# Altium PCB PCB3.PcbDoc (part 1 of 3)
Units mil, origin at the board's own origin, x right, y up, seen from the top; angles counter-clockwise.
Board outline 3693.31 x 2873.7 mil, 2 copper layers (Top Layer, Bottom Layer); 240 components, 0 nets, 816 pads, 396 vias.
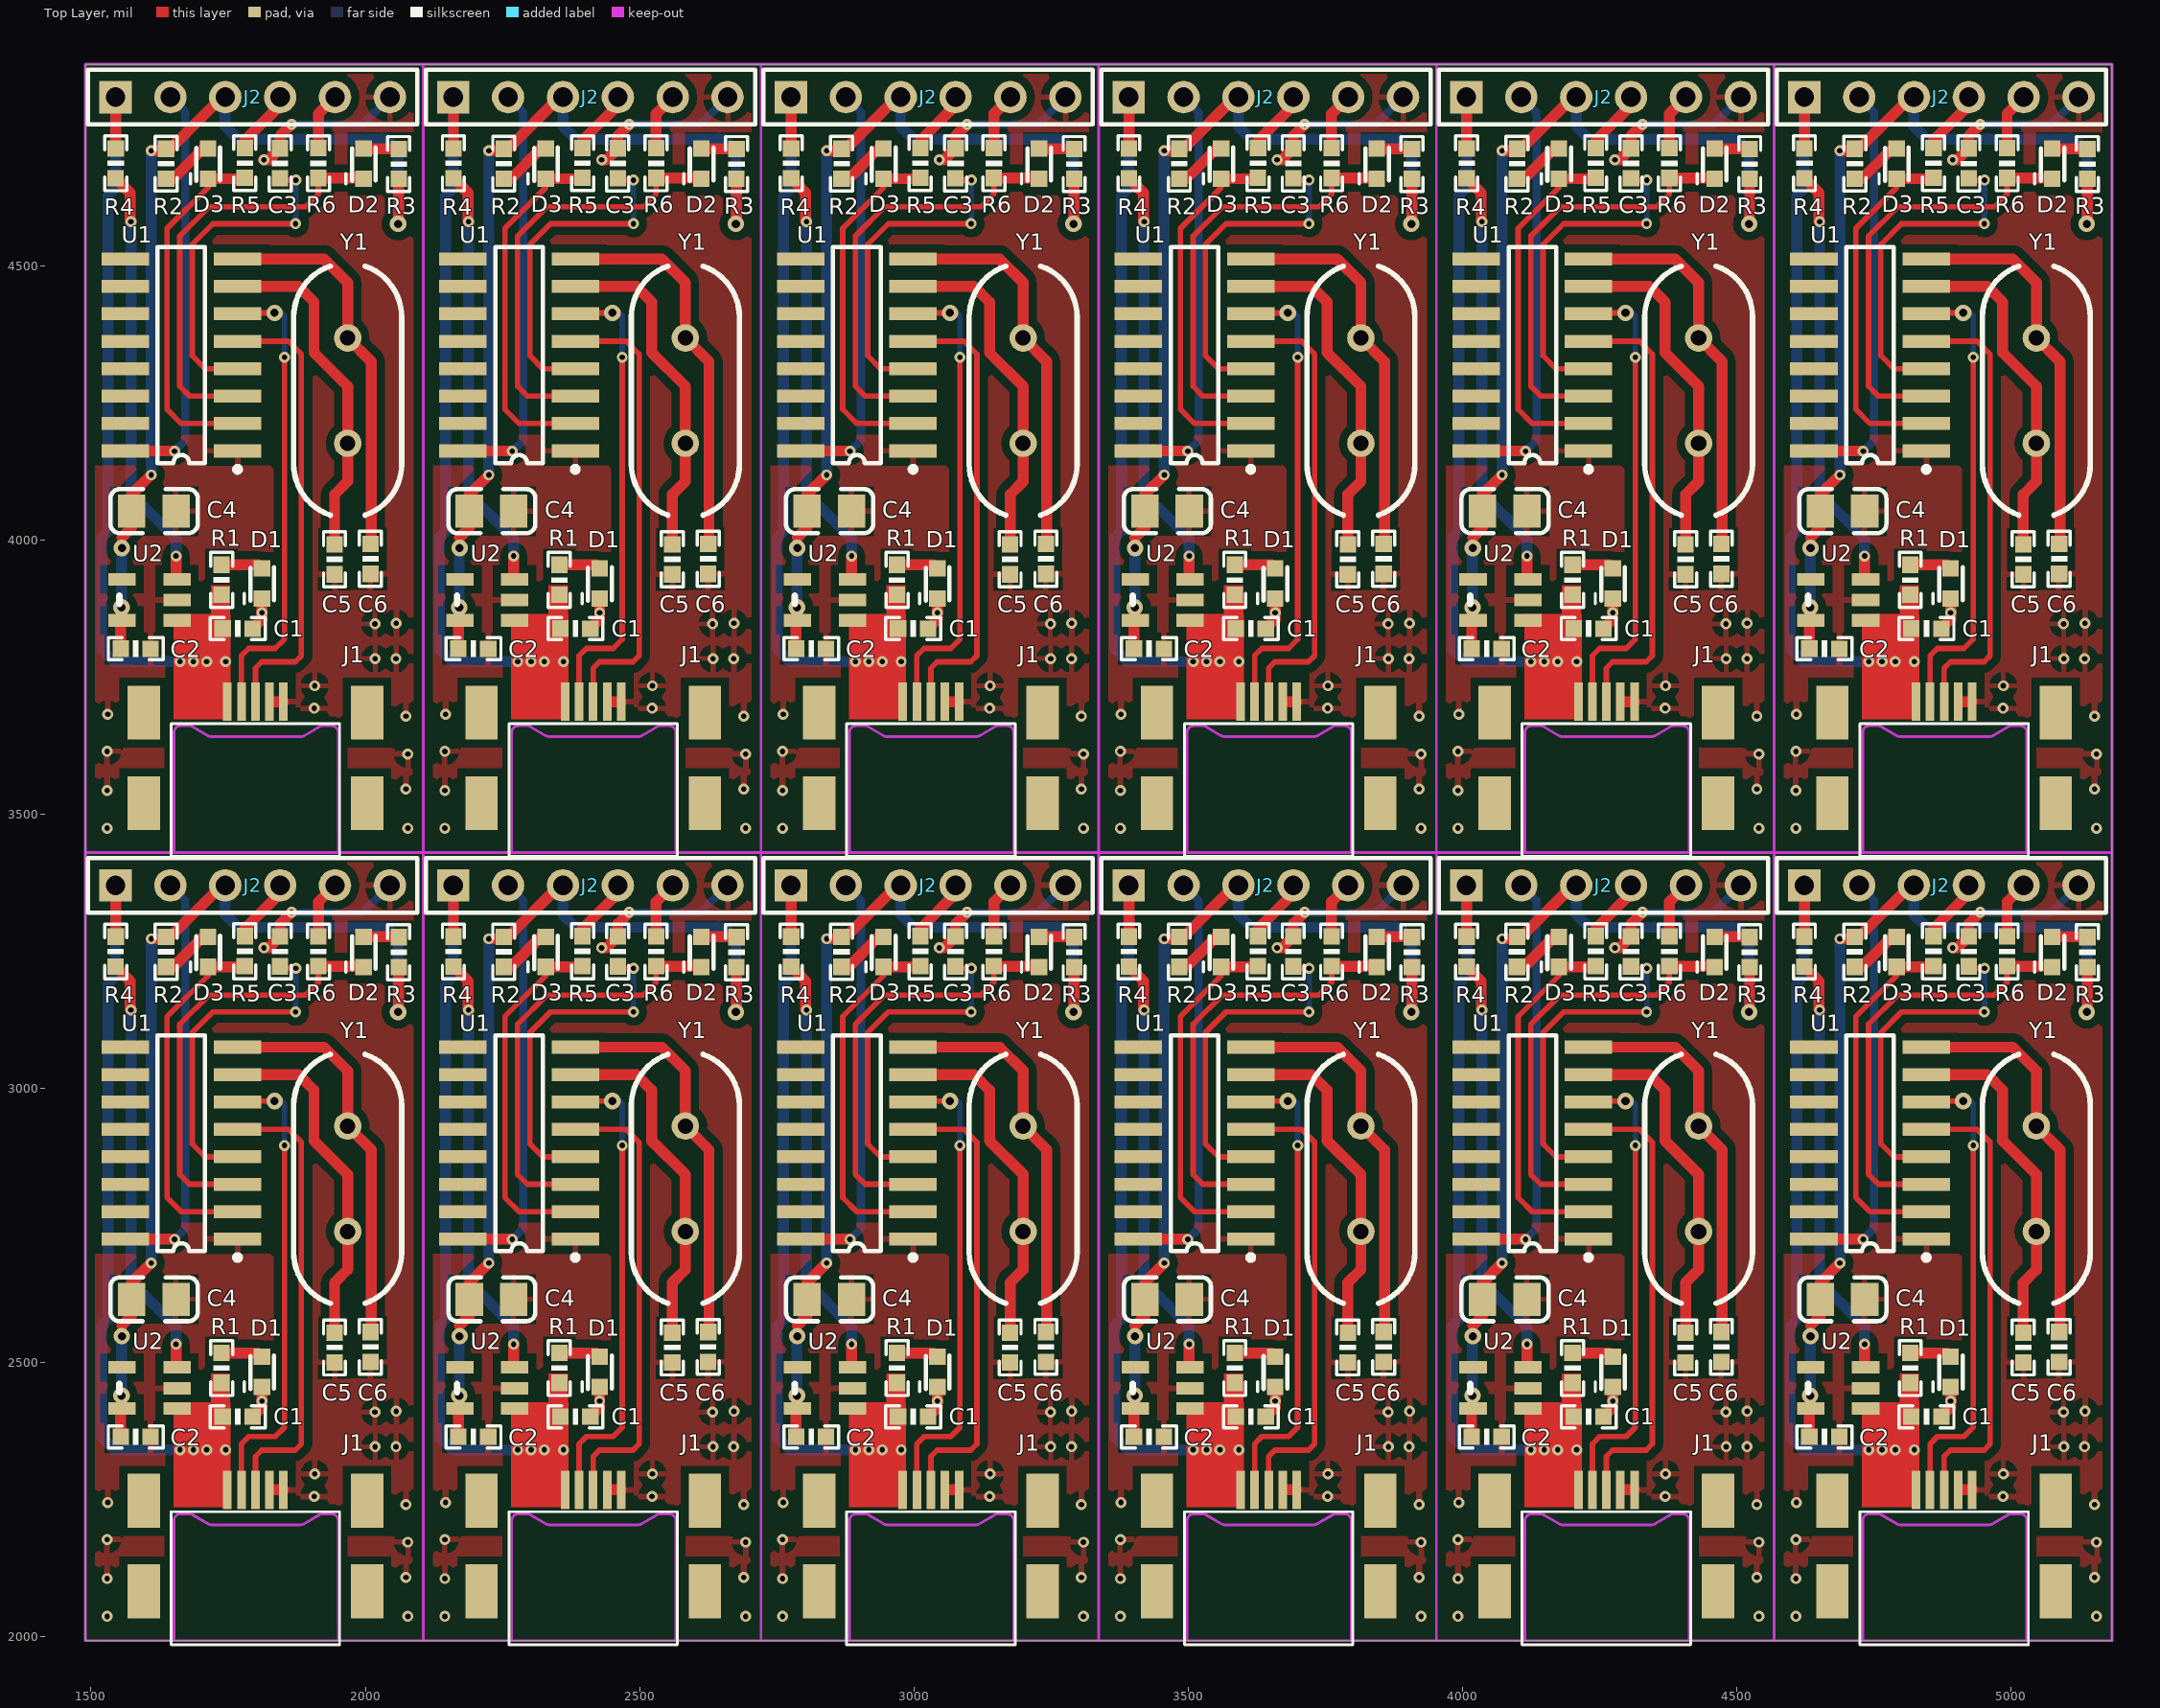
[diagram p0: Top Layer view]
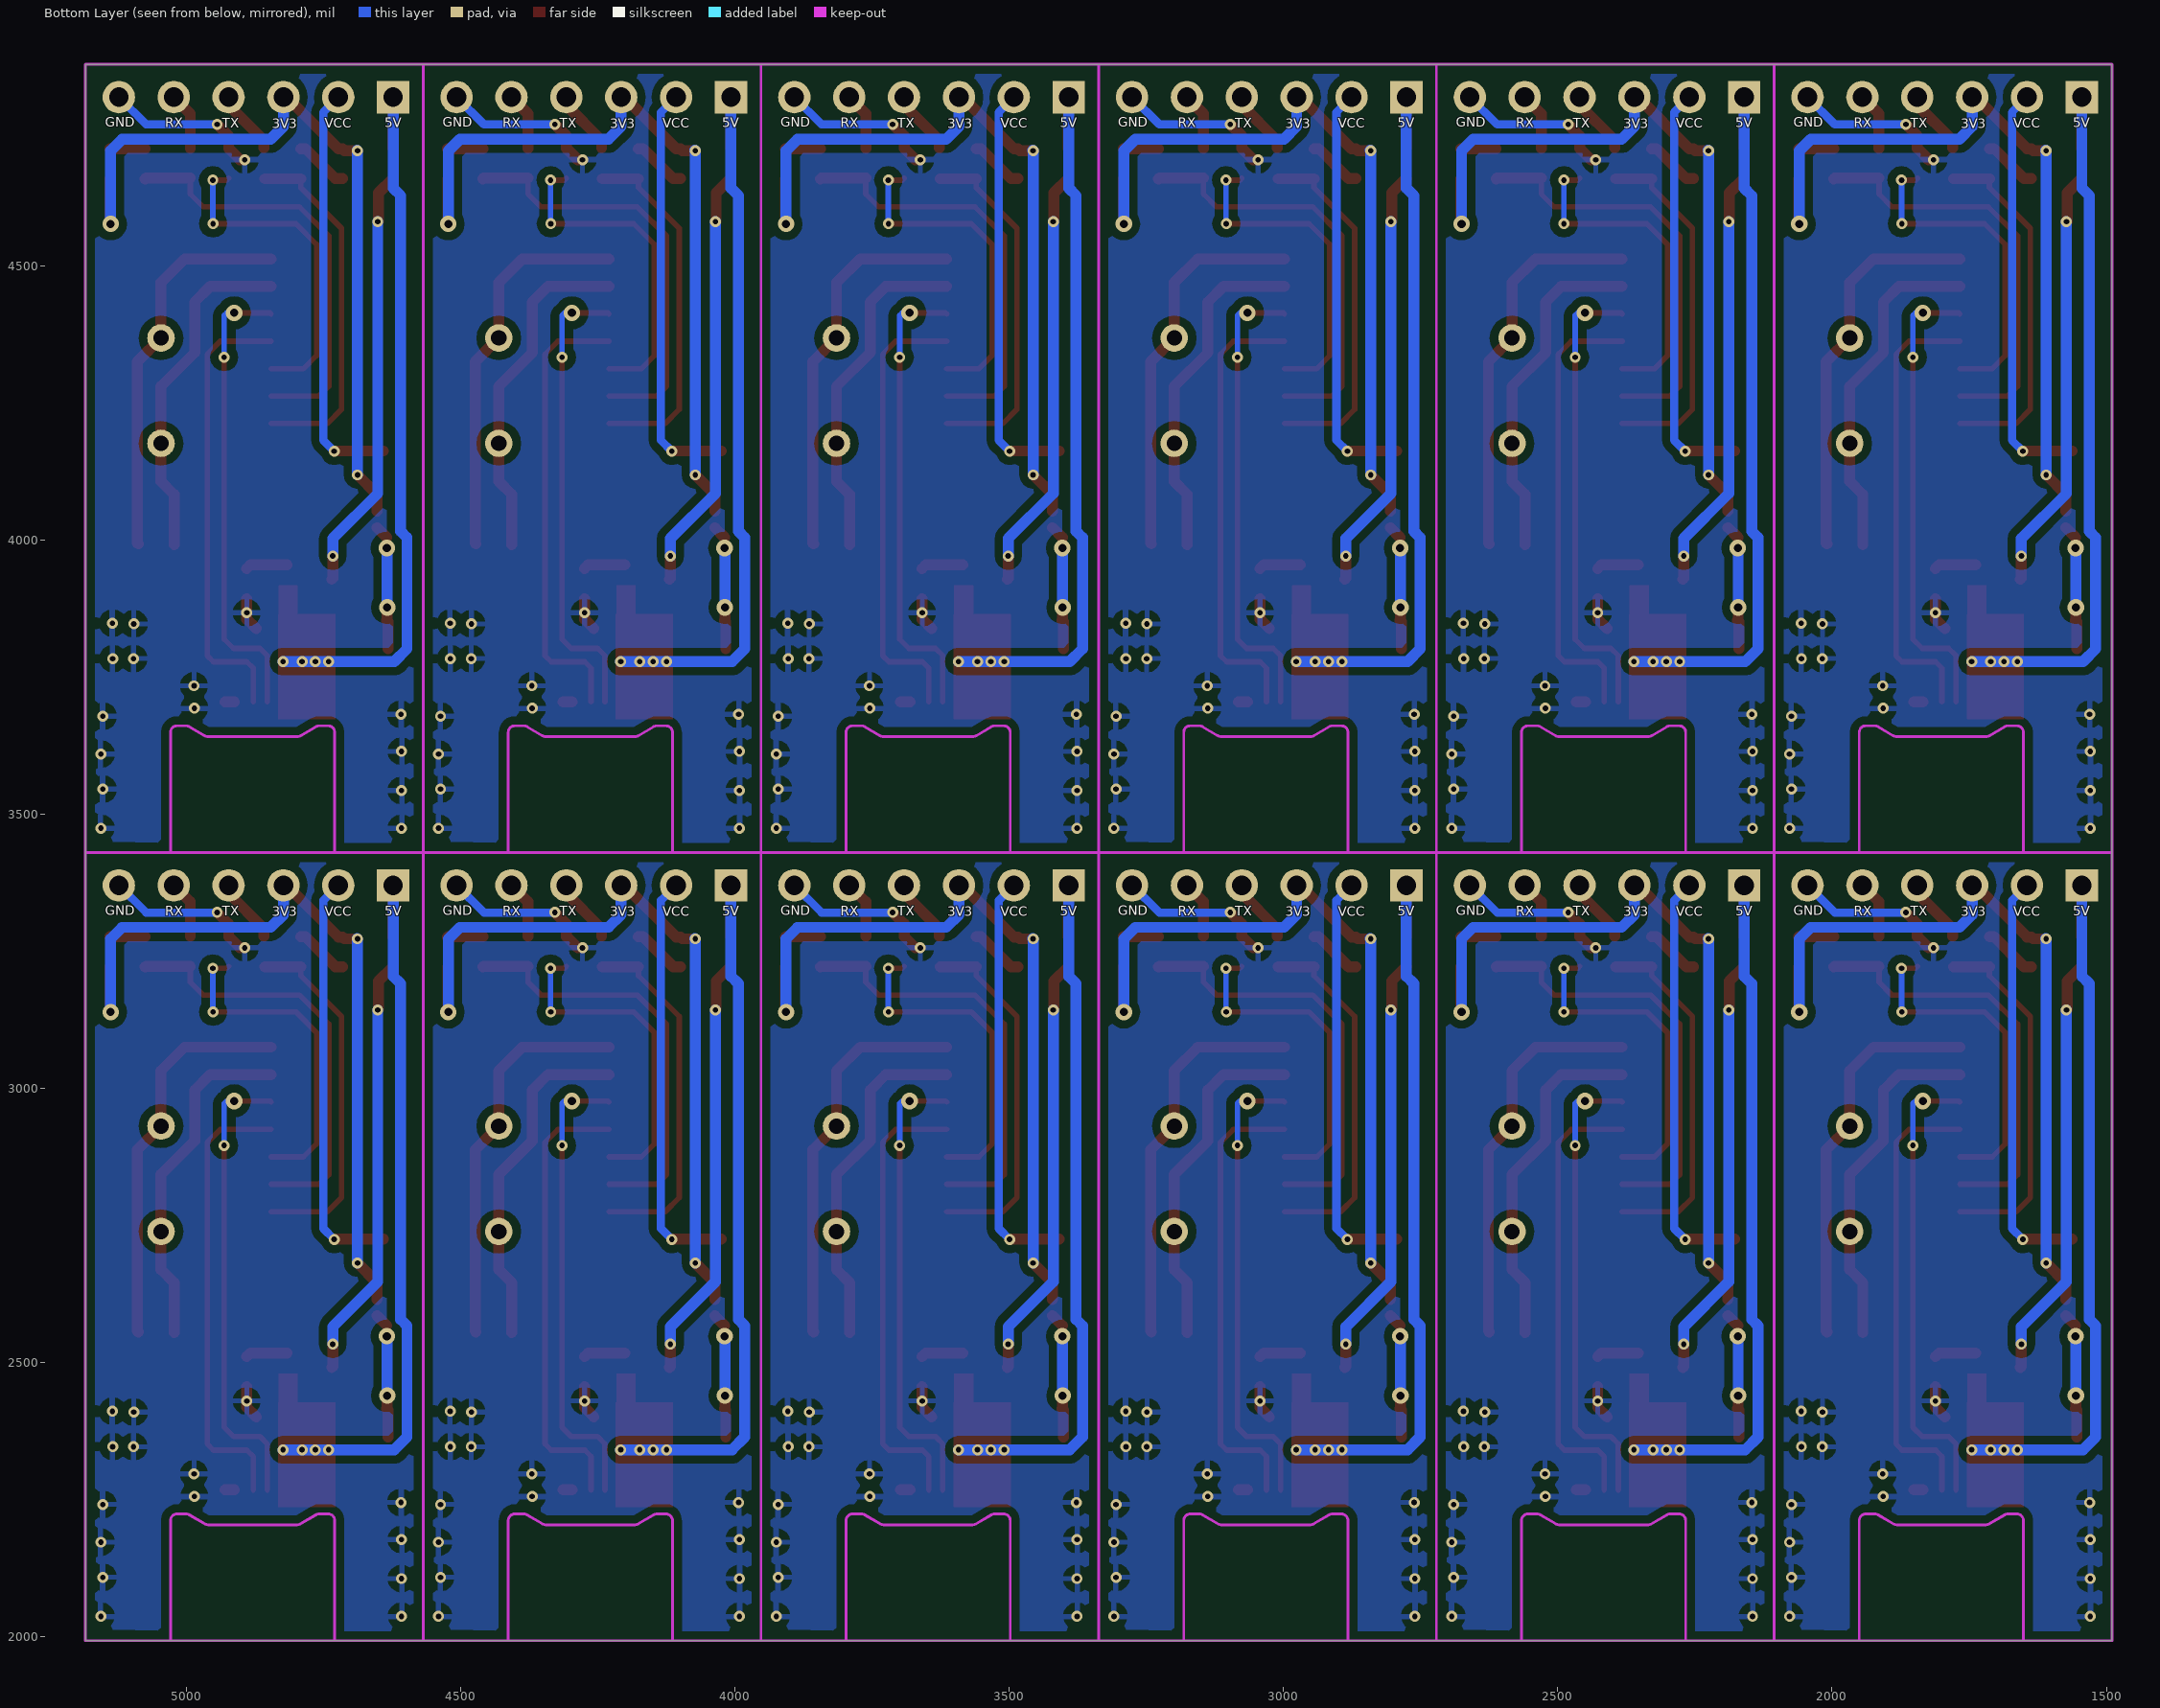
[diagram p1: Bottom Layer view, seen from below]

## Layer stack, top to bottom
Top Layer: signal copper 1.4
Dielectric: dielectric 12.6, FR-4, Dk 4.8
Bottom Layer: signal copper 1.4

## Board outline
1490,1993.15 1490,4866.85 5183.31,4866.85 5183.31,1993.15

## Design rules (kind name [scope] priority, off if disabled: settings)
Clearance [All] p1: gap=7
ComponentClearance [All] p1: gap=10 collisioncheckmode=3 verticalgap=0 showdistances=FALSE
HoleToHoleClearance [All] p1: gap=0 allowstackedmicrovias=TRUE
MinimumSolderMaskSliver [All] p1: minsoldermaskwidth=0
PolygonConnect [All] p1: connectstyle=Relief reliefconductorwidth=10 reliefentries=4 polygonreliefangle="90 Angle"
RoutingVias [All] p1: holewidth=28 width=50 viastyle="Through Hole" minholewidth=8 minwidth=8 maxholewidth=28 maxwidth=50
SilkToSilkClearance [All] p1: silktosilkclearance=0
SilkscreenOverComponentPads [All] p1: minsilkscreentomaskgap=0
SolderMaskExpansion [All] p1: expansion=4
Width [All] p1: maxlimit=50 minlimit=6 preferedwidth=10
23 further rules are at their usual default settings.

## Components (designator, comment, footprint, x,y, rotation, side; value= is the part's Value field where it differs from the comment)
C1 "0.1uF" 0603P 4845.28,2401.38 r180 top
C1 "0.1uF" 0603P 4229.73,2401.38 r180 top
C1 "0.1uF" 0603P 3614.18,2401.38 r180 top
C1 "0.1uF" 0603P 2998.63,2401.38 r180 top
C1 "0.1uF" 0603P 2383.08,2401.38 r180 top
C1 "0.1uF" 0603P 1767.52,2401.38 r180 top
C1 "0.1uF" 0603P 4845.28,3838.23 r180 top
C1 "0.1uF" 0603P 4229.73,3838.23 r180 top
C1 "0.1uF" 0603P 3614.18,3838.23 r180 top
C1 "0.1uF" 0603P 2998.63,3838.23 r180 top
C1 "0.1uF" 0603P 2383.08,3838.23 r180 top
C1 "0.1uF" 0603P 1767.52,3838.23 r180 top
C2 "0.1uF" 0603P 4659.38,2364.67 r180 top
C2 "0.1uF" 0603P 4043.83,2364.67 r180 top
C2 "0.1uF" 0603P 3428.28,2364.67 r180 top
C2 "0.1uF" 0603P 2812.72,2364.67 r180 top
C2 "0.1uF" 0603P 2197.17,2364.67 r180 top
C2 "0.1uF" 0603P 1581.62,2364.67 r180 top
C2 "0.1uF" 0603P 4659.38,3801.51 r180 top
C2 "0.1uF" 0603P 4043.83,3801.51 r180 top
C2 "0.1uF" 0603P 3428.28,3801.51 r180 top
C2 "0.1uF" 0603P 2812.72,3801.51 r180 top
C2 "0.1uF" 0603P 2197.17,3801.51 r180 top
C2 "0.1uF" 0603P 1581.62,3801.51 r180 top
C3 "0.1uF" 0603P 4922.33,3249.46 r90 top
C3 "0.1uF" 0603P 4306.78,3249.46 r90 top
C3 "0.1uF" 0603P 3691.23,3249.46 r90 top
C3 "0.1uF" 0603P 3075.68,3249.46 r90 top
C3 "0.1uF" 0603P 2460.12,3249.46 r90 top
C3 "0.1uF" 0603P 1844.57,3249.46 r90 top
C3 "0.1uF" 0603P 4922.33,4686.31 r90 top
C3 "0.1uF" 0603P 4306.78,4686.31 r90 top
C3 "0.1uF" 0603P 3691.23,4686.31 r90 top
C3 "0.1uF" 0603P 3075.68,4686.31 r90 top
C3 "0.1uF" 0603P 2460.12,4686.31 r90 top
C3 "0.1uF" 0603P 1844.57,4686.31 r90 top
C4 "4.7uF" FT_0805_C 4732.84,2615.53 r180 top
C4 "4.7uF" FT_0805_C 4117.28,2615.53 r180 top
C4 "4.7uF" FT_0805_C 3501.73,2615.53 r180 top
C4 "4.7uF" FT_0805_C 2886.18,2615.53 r180 top
C4 "4.7uF" FT_0805_C 2270.63,2615.53 r180 top
C4 "4.7uF" FT_0805_C 1655.08,2615.53 r180 top
C4 "4.7uF" FT_0805_C 4732.84,4052.37 r180 top
C4 "4.7uF" FT_0805_C 4117.28,4052.37 r180 top
C4 "4.7uF" FT_0805_C 3501.73,4052.37 r180 top
C4 "4.7uF" FT_0805_C 2886.18,4052.37 r180 top
C4 "4.7uF" FT_0805_C 2270.63,4052.37 r180 top
C4 "4.7uF" FT_0805_C 1655.08,4052.37 r180 top
C5 "22" 0603P 5021.79,2527.66 r270 top
C5 "22" 0603P 4406.23,2527.66 r270 top
C5 "22" 0603P 3790.68,2527.66 r270 top
C5 "22" 0603P 3175.13,2527.66 r270 top
C5 "22" 0603P 2559.58,2527.66 r270 top
C5 "22" 0603P 1944.03,2527.66 r270 top
C5 "22" 0603P 5021.79,3964.5 r270 top
C5 "22" 0603P 4406.23,3964.5 r270 top
C5 "22" 0603P 3790.68,3964.5 r270 top
C5 "22" 0603P 3175.13,3964.5 r270 top
C5 "22" 0603P 2559.58,3964.5 r270 top
C5 "22" 0603P 1944.03,3964.5 r270 top
C6 "22" 0603P 5087.18,2528.76 r270 top
C6 "22" 0603P 4471.63,2528.76 r270 top
C6 "22" 0603P 3856.07,2528.76 r270 top
C6 "22" 0603P 3240.52,2528.76 r270 top
C6 "22" 0603P 2624.97,2528.76 r270 top
C6 "22" 0603P 2009.42,2528.76 r270 top
C6 "22" 0603P 5087.18,3965.61 r270 top
C6 "22" 0603P 4471.63,3965.61 r270 top
C6 "22" 0603P 3856.07,3965.61 r270 top
C6 "22" 0603P 3240.52,3965.61 r270 top
C6 "22" 0603P 2624.97,3965.61 r270 top
C6 "22" 0603P 2009.42,3965.61 r270 top
D1 "GREEN" FT_0603_D 4889.34,2511.06 r270 top
D1 "GREEN" FT_0603_D 4273.79,2511.06 r270 top
D1 "GREEN" FT_0603_D 3658.24,2511.06 r270 top
D1 "GREEN" FT_0603_D 3042.68,2511.06 r270 top
D1 "GREEN" FT_0603_D 2427.13,2511.06 r270 top
D1 "GREEN" FT_0603_D 1811.58,2511.06 r270 top
D1 "GREEN" FT_0603_D 4889.34,3947.91 r270 top
D1 "GREEN" FT_0603_D 4273.79,3947.91 r270 top
D1 "GREEN" FT_0603_D 3658.24,3947.91 r270 top
D1 "GREEN" FT_0603_D 3042.68,3947.91 r270 top
D1 "GREEN" FT_0603_D 2427.13,3947.91 r270 top
D1 "GREEN" FT_0603_D 1811.58,3947.91 r270 top
D2 "GREEN" FT_0603_D 5074.63,3276.28 r270 top
D2 "GREEN" FT_0603_D 4459.08,3276.28 r270 top
D2 "GREEN" FT_0603_D 3843.53,3276.28 r270 top
D2 "GREEN" FT_0603_D 3227.97,3276.28 r270 top
D2 "GREEN" FT_0603_D 2612.42,3276.28 r270 top
D2 "GREEN" FT_0603_D 1996.87,3276.28 r270 top
D2 "GREEN" FT_0603_D 5074.63,4713.13 r270 top
D2 "GREEN" FT_0603_D 4459.08,4713.13 r270 top
D2 "GREEN" FT_0603_D 3843.53,4713.13 r270 top
D2 "GREEN" FT_0603_D 3227.97,4713.13 r270 top
D2 "GREEN" FT_0603_D 2612.42,4713.13 r270 top
D2 "GREEN" FT_0603_D 1996.87,4713.13 r270 top
D3 "GREEN" FT_0603_D 4790.98,3276.43 r270 top
D3 "GREEN" FT_0603_D 4175.43,3276.43 r270 top
D3 "GREEN" FT_0603_D 3559.87,3276.43 r270 top
D3 "GREEN" FT_0603_D 2944.32,3276.43 r270 top
D3 "GREEN" FT_0603_D 2328.77,3276.43 r270 top
D3 "GREEN" FT_0603_D 1713.22,3276.43 r270 top
D3 "GREEN" FT_0603_D 4790.98,4713.28 r270 top
D3 "GREEN" FT_0603_D 4175.43,4713.28 r270 top
D3 "GREEN" FT_0603_D 3559.87,4713.28 r270 top
D3 "GREEN" FT_0603_D 2944.32,4713.28 r270 top
D3 "GREEN" FT_0603_D 2328.77,4713.28 r270 top
D3 "GREEN" FT_0603_D 1713.22,4713.28 r270 top
J1 "USB-LINE" FT_USBIF_Micro_BT_CB 4826.32,2258.13 r180 top locked
J1 "USB-LINE" FT_USBIF_Micro_BT_CB 4210.77,2258.13 r180 top locked
J1 "USB-LINE" FT_USBIF_Micro_BT_CB 3595.22,2258.13 r180 top locked
J1 "USB-LINE" FT_USBIF_Micro_BT_CB 2979.67,2258.13 r180 top locked
J1 "USB-LINE" FT_USBIF_Micro_BT_CB 2364.11,2258.13 r180 top locked
J1 "USB-LINE" FT_USBIF_Micro_BT_CB 1748.56,2258.13 r180 top locked
J1 "USB-LINE" FT_USBIF_Micro_BT_CB 4826.32,3694.97 r180 top locked
J1 "USB-LINE" FT_USBIF_Micro_BT_CB 4210.77,3694.97 r180 top locked
J1 "USB-LINE" FT_USBIF_Micro_BT_CB 3595.22,3694.97 r180 top locked
J1 "USB-LINE" FT_USBIF_Micro_BT_CB 2979.67,3694.97 r180 top locked
J1 "USB-LINE" FT_USBIF_Micro_BT_CB 2364.11,3694.97 r180 top locked
J1 "USB-LINE" FT_USBIF_Micro_BT_CB 1748.56,3694.97 r180 top locked
J2 "CON6" HDR1X6 4622.5,3370.22 r0 top locked
J2 "CON6" HDR1X6 4006.95,3370.22 r0 top locked
J2 "CON6" HDR1X6 3391.39,3370.22 r0 top locked
J2 "CON6" HDR1X6 2775.84,3370.22 r0 top locked
J2 "CON6" HDR1X6 2160.29,3370.22 r0 top locked
J2 "CON6" HDR1X6 1544.74,3370.22 r0 top locked
J2 "CON6" HDR1X6 4622.5,4807.07 r0 top locked
J2 "CON6" HDR1X6 4006.95,4807.07 r0 top locked
J2 "CON6" HDR1X6 3391.39,4807.07 r0 top locked
J2 "CON6" HDR1X6 2775.84,4807.07 r0 top locked
J2 "CON6" HDR1X6 2160.29,4807.07 r0 top locked
J2 "CON6" HDR1X6 1544.74,4807.07 r0 top locked
R1 "1k" 0603P 4815.71,2490.1 r90 top
R1 "1k" 0603P 4200.16,2490.1 r90 top
R1 "1k" 0603P 3584.6,2490.1 r90 top
R1 "1k" 0603P 2969.05,2490.1 r90 top
R1 "1k" 0603P 2353.5,2490.1 r90 top
R1 "1k" 0603P 1737.95,2490.1 r90 top
R1 "1k" 0603P 4815.71,3926.95 r90 top
R1 "1k" 0603P 4200.16,3926.95 r90 top
R1 "1k" 0603P 3584.6,3926.95 r90 top
R1 "1k" 0603P 2969.05,3926.95 r90 top
R1 "1k" 0603P 2353.5,3926.95 r90 top
R1 "1k" 0603P 1737.95,3926.95 r90 top
R2 "1k" 0603P 4714.67,3249.02 r270 top
R2 "1k" 0603P 4099.12,3249.02 r270 top
R2 "1k" 0603P 3483.57,3249.02 r270 top
R2 "1k" 0603P 2868.01,3249.02 r270 top
R2 "1k" 0603P 2252.46,3249.02 r270 top
R2 "1k" 0603P 1636.91,3249.02 r270 top
R2 "1k" 0603P 4714.67,4685.87 r270 top
R2 "1k" 0603P 4099.12,4685.87 r270 top
R2 "1k" 0603P 3483.57,4685.87 r270 top
R2 "1k" 0603P 2868.01,4685.87 r270 top
R2 "1k" 0603P 2252.46,4685.87 r270 top
R2 "1k" 0603P 1636.91,4685.87 r270 top
R3 "1k" 0603P 5138.64,3248.29 r90 top
R3 "1k" 0603P 4523.08,3248.29 r90 top
R3 "1k" 0603P 3907.53,3248.29 r90 top
R3 "1k" 0603P 3291.98,3248.29 r90 top
R3 "1k" 0603P 2676.43,3248.29 r90 top
R3 "1k" 0603P 2060.88,3248.29 r90 top
R3 "1k" 0603P 5138.64,4685.13 r90 top
R3 "1k" 0603P 4523.08,4685.13 r90 top
R3 "1k" 0603P 3907.53,4685.13 r90 top
R3 "1k" 0603P 3291.98,4685.13 r90 top
R3 "1k" 0603P 2676.43,4685.13 r90 top
R3 "1k" 0603P 2060.88,4685.13 r90 top
R4 "10k" 0603P 4622.87,3249.65 r270 top
R4 "10k" 0603P 4007.32,3249.65 r270 top
R4 "10k" 0603P 3391.77,3249.65 r270 top
R4 "10k" 0603P 2776.22,3249.65 r270 top
R4 "10k" 0603P 2160.66,3249.65 r270 top
R4 "10k" 0603P 1545.11,3249.65 r270 top
R4 "10k" 0603P 4622.87,4686.5 r270 top
R4 "10k" 0603P 4007.32,4686.5 r270 top
R4 "10k" 0603P 3391.77,4686.5 r270 top
R4 "10k" 0603P 2776.22,4686.5 r270 top
R4 "10k" 0603P 2160.66,4686.5 r270 top
R4 "10k" 0603P 1545.11,4686.5 r270 top
R5 "200" 0603P 4858.09,3249.96 r90 top
R5 "200" 0603P 4242.54,3249.96 r90 top
R5 "200" 0603P 3626.99,3249.96 r90 top
R5 "200" 0603P 3011.43,3249.96 r90 top
R5 "200" 0603P 2395.88,3249.96 r90 top
R5 "200" 0603P 1780.33,3249.96 r90 top
R5 "200" 0603P 4858.09,4686.8 r90 top
R5 "200" 0603P 4242.54,4686.8 r90 top
R5 "200" 0603P 3626.99,4686.8 r90 top
R5 "200" 0603P 3011.43,4686.8 r90 top
R5 "200" 0603P 2395.88,4686.8 r90 top
R5 "200" 0603P 1780.33,4686.8 r90 top
R6 "200" 0603P 4992.23,3249.65 r90 top
R6 "200" 0603P 4376.68,3249.65 r90 top
R6 "200" 0603P 3761.12,3249.65 r90 top
R6 "200" 0603P 3145.57,3249.65 r90 top
R6 "200" 0603P 2530.02,3249.65 r90 top
R6 "200" 0603P 1914.47,3249.65 r90 top
R6 "200" 0603P 4992.23,4686.5 r90 top
R6 "200" 0603P 4376.68,4686.5 r90 top
R6 "200" 0603P 3761.12,4686.5 r90 top
R6 "200" 0603P 3145.57,4686.5 r90 top
R6 "200" 0603P 2530.02,4686.5 r90 top
R6 "200" 0603P 1914.47,4686.5 r90 top
U1 "CH340G" SOP16M 4742.53,2900.22 r90 top
U1 "CH340G" SOP16M 4126.98,2900.22 r90 top
U1 "CH340G" SOP16M 3511.42,2900.22 r90 top
U1 "CH340G" SOP16M 2895.87,2900.22 r90 top
U1 "CH340G" SOP16M 2280.32,2900.22 r90 top
U1 "CH340G" SOP16M 1664.77,2900.22 r90 top
U1 "CH340G" SOP16M 4742.53,4337.06 r90 top
U1 "CH340G" SOP16M 4126.98,4337.06 r90 top
U1 "CH340G" SOP16M 3511.42,4337.06 r90 top
U1 "CH340G" SOP16M 2895.87,4337.06 r90 top
U1 "CH340G" SOP16M 2280.32,4337.06 r90 top
U1 "CH340G" SOP16M 1664.77,4337.06 r90 top
U2 "BL8558-33" FT_SOT-23-5 4734.51,2416.38 r180 top
U2 "BL8558-33" FT_SOT-23-5 4118.96,2416.38 r180 top
U2 "BL8558-33" FT_SOT-23-5 3503.41,2416.38 r180 top
U2 "BL8558-33" FT_SOT-23-5 2887.86,2416.38 r180 top
U2 "BL8558-33" FT_SOT-23-5 2272.3,2416.38 r180 top
U2 "BL8558-33" FT_SOT-23-5 1656.75,2416.38 r180 top
U2 "BL8558-33" FT_SOT-23-5 4734.51,3853.22 r180 top
U2 "BL8558-33" FT_SOT-23-5 4118.96,3853.22 r180 top
U2 "BL8558-33" FT_SOT-23-5 3503.41,3853.22 r180 top
U2 "BL8558-33" FT_SOT-23-5 2887.86,3853.22 r180 top
U2 "BL8558-33" FT_SOT-23-5 2272.3,3853.22 r180 top
U2 "BL8558-33" FT_SOT-23-5 1656.75,3853.22 r180 top
Y1 "12.288MHz" XTAL_US 5045.61,2739.15 r90 top
Y1 "12.288MHz" XTAL_US 4430.06,2739.15 r90 top
Y1 "12.288MHz" XTAL_US 3814.51,2739.15 r90 top
Y1 "12.288MHz" XTAL_US 3198.96,2739.15 r90 top
Y1 "12.288MHz" XTAL_US 2583.41,2739.15 r90 top
Y1 "12.288MHz" XTAL_US 1967.85,2739.15 r90 top
Y1 "12.288MHz" XTAL_US 5045.61,4176 r90 top
Y1 "12.288MHz" XTAL_US 4430.06,4176 r90 top
Y1 "12.288MHz" XTAL_US 3814.51,4176 r90 top
Y1 "12.288MHz" XTAL_US 3198.96,4176 r90 top
Y1 "12.288MHz" XTAL_US 2583.41,4176 r90 top
Y1 "12.288MHz" XTAL_US 1967.85,4176 r90 top

## Footprints (in the part's own frame and the unit in brackets; to place one, negate y for a bottom-side part, rotate by r counter-clockwise, add the part's x,y. Pads: shape width x height; smd on the part's side, far side on the other; paste and mask are expansions set on the pad)
0603P [mil]
  rect 30x30 smd: 1(-27,0) 2(27.5,-0.06)
  silkscreen extent -50,-20 50,20
FT_0603_D [mil]
  rect 30x30 smd: 1(0,0) 2(55,0)
  silkscreen extent -2,-32 64,22
FT_0805_C [mil]
  rect 50x60 smd: 1(0,0) 2(81,0)
  silkscreen extent -39,-40 119,40
FT_SOT-23-5 [mm]
  rect 1.27x0.58 smd: 1(0,0) 2(0,-0.94) 3(0,-1.905) 4(2.54,-1.905) 5(2.54,0)
  silkscreen extent 2.67,-1.14 2.67,-0.76
FT_USBIF_Micro_BT_CB [mm] "MUP-U526"
  rect 1.5x2.5 smd: 0(-6.47,4.445) 0(-6.47,0.254) 0(3.87,4.445) 0(3.87,0.254)
  rect 0.4x1.778 smd: 1(0,-0.254) 2(-0.65,-0.254) 3(-1.3,-0.254) 4(-1.95,-0.254) 5(-2.6,-0.254)
  silkscreen extent -5.2,0.76 2.6,6.91
HDR1X6 [mm] "Connector; Header; 6 Position"
  rect 1.5x1.5 hole 0.9: 1(0,0)
  round 1.5 hole 0.9: 2(2.54,0) 3(5.08,0) 4(7.62,0) 5(10.16,0) 6(12.7,0)
  silkscreen extent -1.27,-1.27 13.97,1.27
SOP16M [mm]
  rect 0.6x2.2 smd: 1(-4.445,-2.6) 2(-3.175,-2.6) 3(-1.905,-2.6) 4(-0.635,-2.6) 5(0.635,-2.6) 6(1.905,-2.6) 7(3.175,-2.6) 8(4.445,-2.6) 9(4.445,2.6) 10(3.175,2.6) 11(1.905,2.6) 12(0.635,2.6) 13(-0.635,2.6) 14(-1.905,2.6) 15(-3.175,2.6) 16(-4.445,2.6)
  silkscreen extent -5.42,-2.72 5,1.1
XTAL_US [mil]
  round 50 hole 28: 1(0,0) 2(192.13,0)
  silkscreen extent -131,-98 323,98

## Part data
C1 C1 C1 C1 C1 C1 C1 C1 C1 C1 C1 C1 C2 C2 C2 C2 C2 C2 C2 C2 C2 C2 C2 C2 C3 C3 C3 C3 C3 C3 C3 C3 C3 C3 C3 C3: library part Capacitor, "CAP CER .1UF 16V 10% X7R 0603"
C4 C4 C4 C4 C4 C4 C4 C4 C4 C4 C4 C4: library part CAP, "Capacitor"
C5 C5 C5 C5 C5 C5 C5 C5 C5 C5 C5 C5 C6 C6 C6 C6 C6 C6 C6 C6 C6 C6 C6 C6: library part Cap, "Capacitor"
D1 D1 D1 D1 D1 D1 D1 D1 D1 D1 D1 D1 D2 D2 D2 D2 D2 D2 D2 D2 D2 D2 D2 D2 D3 D3 D3 D3 D3 D3 D3 D3 D3 D3 D3 D3: library part LED
R1 R1 R1 R1 R1 R1 R1 R1 R1 R1 R1 R1 R2 R2 R2 R2 R2 R2 R2 R2 R2 R2 R2 R2 R3 R3 R3 R3 R3 R3 R3 R3 R3 R3 R3 R3 R4 R4 R4 R4 R4 R4 R4 R4 R4 R4 R4 R4 R5 R5 R5 R5 R5 R5 R5 R5 R5 R5 R5 R5 R6 R6 R6 R6 R6 R6 R6 R6 R6 R6 R6 R6: library part Resistor, "RES 1.0M OHM 1/10W 5% 0603 SMD"
U1 U1 U1 U1 U1 U1 U1 U1 U1 U1 U1 U1: "USB2UART"
U2 U2 U2 U2 U2 U2 U2 U2 U2 U2 U2 U2: library part LDO_5
Y1 Y1 Y1 Y1 Y1 Y1 Y1 Y1 Y1 Y1 Y1 Y1: library part XTAL_2, "Crystal Oscillator"

## Via types
v1: diameter 20, hole 10, Top Layer to Bottom Layer, tented both sides, 348 vias
v2: diameter 30, hole 15, Top Layer to Bottom Layer, tented both sides, 48 vias

## Nets (pads, with @x,y where several pads share a name; then routed paths per layer and width w, separated by ;. In a path a pad name is that pad's centre, name@x,y a point inside that pad or via, vN(x,y) a via of type N, cw(c..) or ccw(c..) an arc to the next point about the centre after c; other vN are vias at no path point)
pads on no net: C1.1 C1.2 C2.1 C2.2 C3.1 C3.2 C4.1 C4.2 C5.1 C5.2 C6.1 C6.2 D1.1 D1.2 D2.1 D2.2 D3.1 D3.2 J1.0 J1.1 J1.2 J1.3 J1.4 J1.5 J2.1 J2.2 J2.3 J2.4 J2.5 J2.6 R1.1 R1.2 R2.1 R2.2 R3.1 R3.2 R4.1 R4.2 R5.1 R5.2 R6.1 R6.2 U1.1 U1.2 U1.3 U1.4 U1.5 U1.6 U1.7 U1.8 U1.9 U1.10 U1.11 U1.12 U1.13 U1.14 U1.15 U1.16 U2.1 U2.2 U2.3 U2.4 U2.5 Y1.1 Y1.2